# Allegro board GPS_INTERFACE_BOARDv7.brd
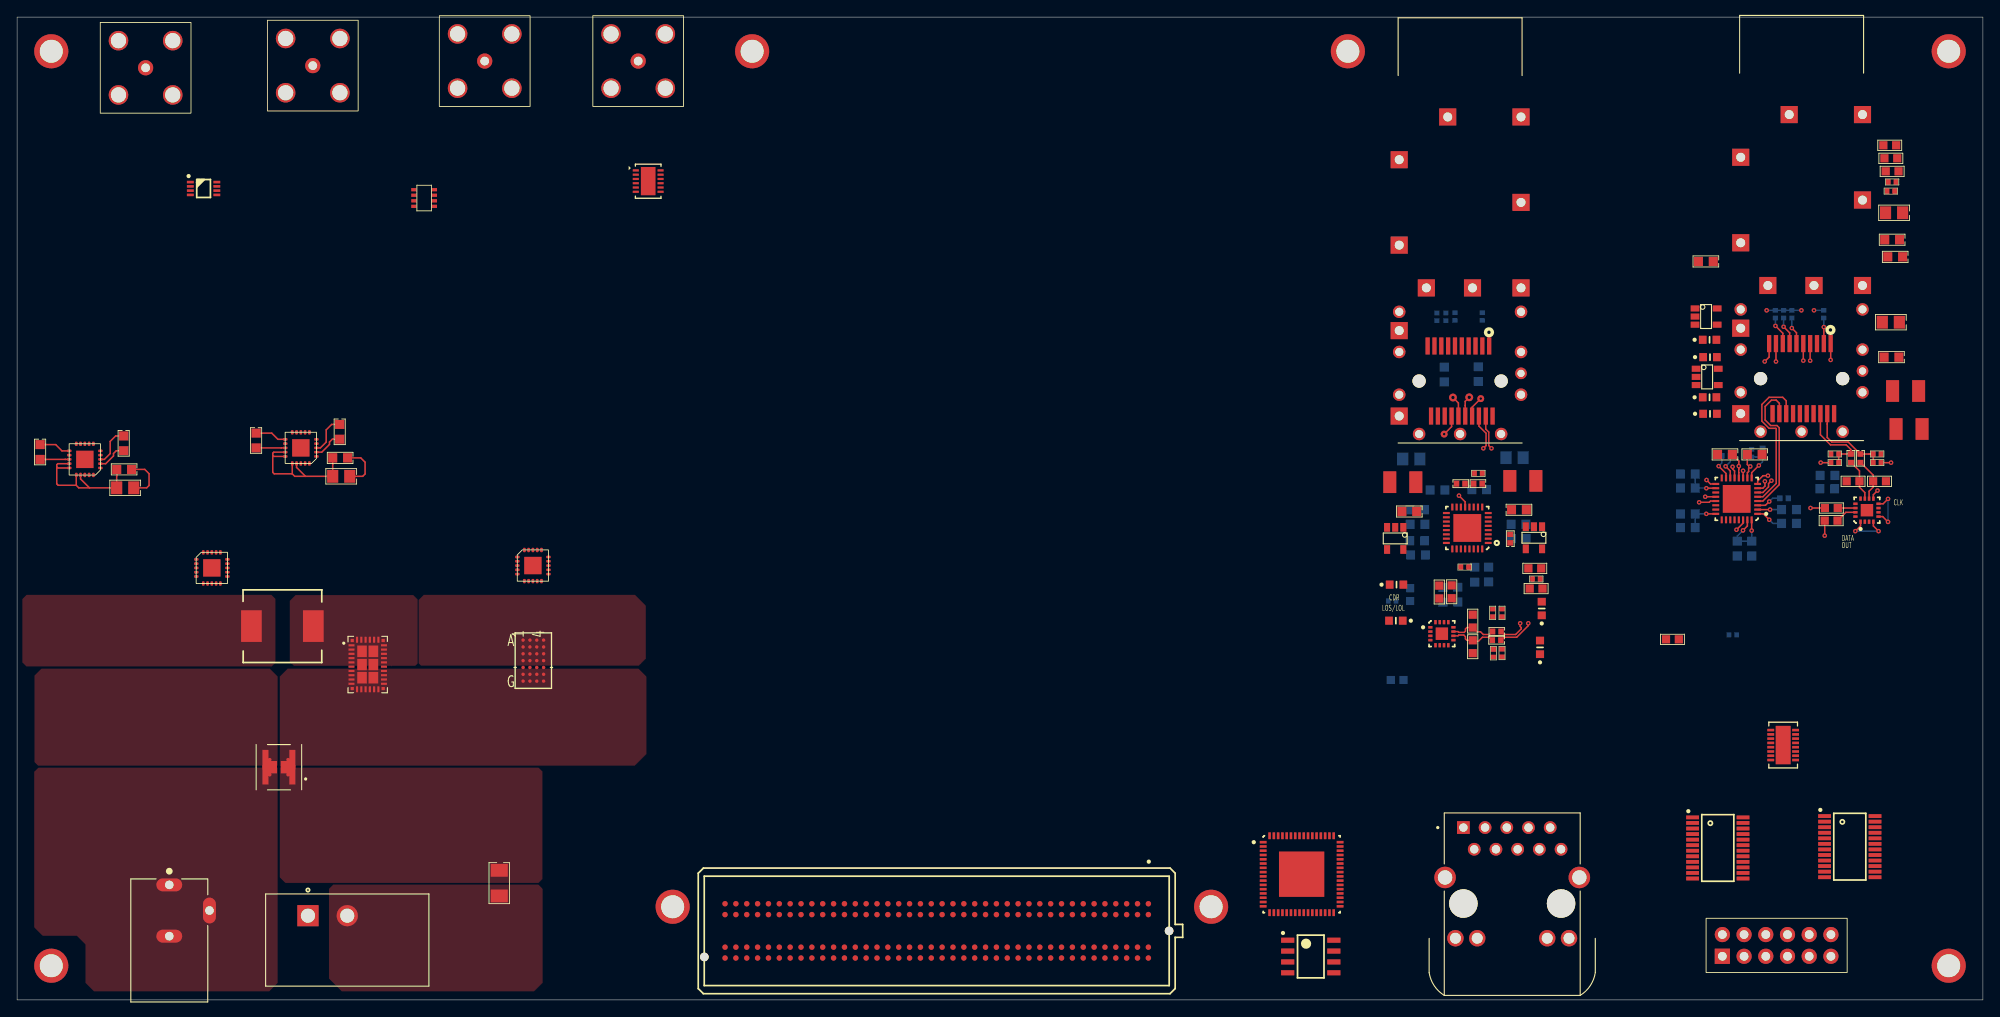
[diagram p0: board, top side]
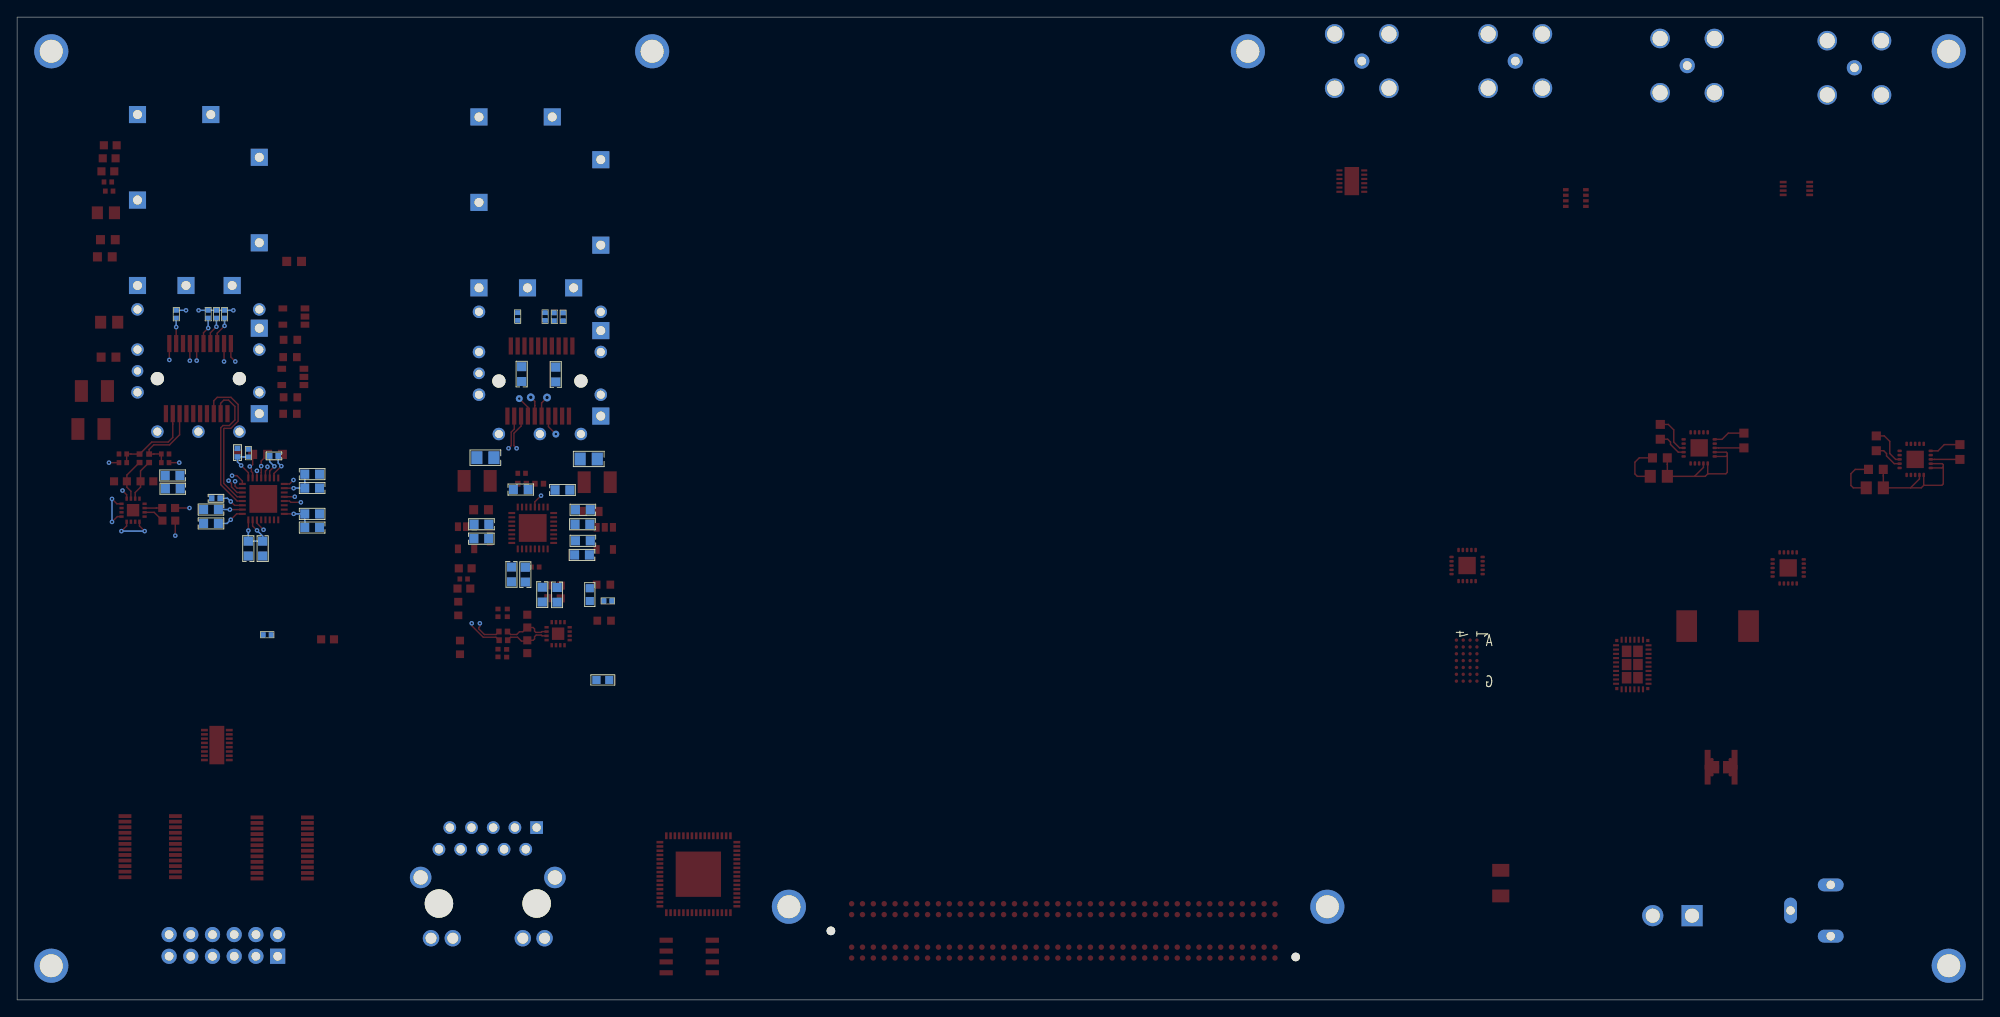
[diagram p1: board, bottom side, seen from below]

Outline 230 x 115 mm; copper layers: TOP, L2, L3, L4, L5, BOTTOM. Coordinates in mm from the lower left corner of the outline.
Outline path: 0,115 230,115 230,0 0,0 0,115

## Design rules (mm)
net group CLK315_SCOPE: nets CLK315_SCOPE_N CLK315_SCOPE_P
net group CLK_FDBACK: nets CLK_FDBACK_N CLK_FDBACK_P
net group CLK_TO_SFP.CLK_TO_SFP0: nets CLK_TO_SFP.CLK_TO_SFP_N0 CLK_TO_SFP.CLK_TO_SFP_P0
net group CLK_TO_SFP.CLK_TO_SFP1: nets CLK_TO_SFP.CLK_TO_SFP_N1 CLK_TO_SFP.CLK_TO_SFP_P1
net group CLK_TO_SFP.CLK_TO_SFP2: nets CLK_TO_SFP.CLK_TO_SFP_N2 CLK_TO_SFP.CLK_TO_SFP_P2
net group CLK_TO_SFP.CLK_TO_SFP3: nets CLK_TO_SFP.CLK_TO_SFP_N3 CLK_TO_SFP.CLK_TO_SFP_P3
net group CLK_TO_SFP.CLK_TO_SFP4: nets CLK_TO_SFP.CLK_TO_SFP_N4 CLK_TO_SFP.CLK_TO_SFP_P4
net group CLK_TO_SFP.CLK_TO_SFP5: nets CLK_TO_SFP.CLK_TO_SFP_N5 CLK_TO_SFP.CLK_TO_SFP_P5
net group CML_SFP_TD_SFP INTERFACE_SFP1: nets CML_SFP_TD_N_SFP INTERFACE_SFP1 CML_SFP_TD_P_SFP INTERFACE_SFP1
net group CML_SFP_TD_SFP INTERFACE_SFP2: nets CML_SFP_TD_N_SFP INTERFACE_SFP2 CML_SFP_TD_P_SFP INTERFACE_SFP2
net group CML_SFP_TD_SFP INTERFACE_SFP3: nets CML_SFP_TD_N_SFP INTERFACE_SFP3 CML_SFP_TD_P_SFP INTERFACE_SFP3
net group CML_SFP_TD_SFP INTERFACE_SFP4: nets CML_SFP_TD_N_SFP INTERFACE_SFP4 CML_SFP_TD_P_SFP INTERFACE_SFP4
net group CML_SFP_TD_SFP INTERFACE_SFP5: nets CML_SFP_TD_N_SFP INTERFACE_SFP5 CML_SFP_TD_P_SFP INTERFACE_SFP5
net group CML_SFP_TD_SFP INTERFACE_SFP6: nets CML_SFP_TD_N_SFP INTERFACE_SFP6 CML_SFP_TD_P_SFP INTERFACE_SFP6
net group FMC.CLK_TO_FPGA: nets FMC.CLK_TO_FPGA_N FMC.CLK_TO_FPGA_P
net group FMC.DATA_TO_FF0: nets FMC.DATA_TO_FF_N0 FMC.DATA_TO_FF_P0
net group FMC.DATA_TO_FF1: nets FMC.DATA_TO_FF_N1 FMC.DATA_TO_FF_P1
net group FMC.DATA_TO_FF2: nets FMC.DATA_TO_FF_N2 FMC.DATA_TO_FF_P2
net group FMC.DATA_TO_FF3: nets FMC.DATA_TO_FF_N3 FMC.DATA_TO_FF_P3
net group FMC.DATA_TO_FF4: nets FMC.DATA_TO_FF_N4 FMC.DATA_TO_FF_P4
net group FMC.DATA_TO_FF5: nets FMC.DATA_TO_FF_N5 FMC.DATA_TO_FF_P5
net group FMC.GPS_PPS: nets FMC.GPS_PPS_N FMC.GPS_PPS_P
net group FMC.GPS_SYNC_OUT: nets FMC.GPS_SYNC_OUT_N FMC.GPS_SYNC_OUT_P
net group FMC.RECOV_CLK0: nets FMC.RECOV_CLK_N0 FMC.RECOV_CLK_P0
net group FMC.RECOV_CLK1: nets FMC.RECOV_CLK_N1 FMC.RECOV_CLK_P1
net group FMC.RECOV_CLK2: nets FMC.RECOV_CLK_N2 FMC.RECOV_CLK_P2
net group FMC.RECOV_CLK3: nets FMC.RECOV_CLK_N3 FMC.RECOV_CLK_P3
net group FMC.RECOV_CLK4: nets FMC.RECOV_CLK_N4 FMC.RECOV_CLK_P4
net group FMC.RECOV_CLK5: nets FMC.RECOV_CLK_N5 FMC.RECOV_CLK_P5
net group FMC.RECOV_DATA0: nets FMC.RECOV_DATA_N0 FMC.RECOV_DATA_P0
net group FMC.RECOV_DATA1: nets FMC.RECOV_DATA_N1 FMC.RECOV_DATA_P1
net group FMC.RECOV_DATA2: nets FMC.RECOV_DATA_N2 FMC.RECOV_DATA_P2
net group FMC.RECOV_DATA3: nets FMC.RECOV_DATA_N3 FMC.RECOV_DATA_P3
net group FMC.RECOV_DATA4: nets FMC.RECOV_DATA_N4 FMC.RECOV_DATA_P4
net group FMC.RECOV_DATA5: nets FMC.RECOV_DATA_N5 FMC.RECOV_DATA_P5
net group GPS_CLK10: nets GPS_CLK10_N GPS_CLK10_P
net group GPS_CLK_SCOPE: nets GPS_CLK_SCOPE_N GPS_CLK_SCOPE_P
net group GPS_GROUP.GPS_CLK: nets GPS_GROUP.GPS_CLK_N GPS_GROUP.GPS_CLK_P
net group R_SFP INTERFACE_SFP1: nets R_N_SFP INTERFACE_SFP1 R_P_SFP INTERFACE_SFP1
net group R_SFP INTERFACE_SFP2: nets R_N_SFP INTERFACE_SFP2 R_P_SFP INTERFACE_SFP2
net group R_SFP INTERFACE_SFP3: nets R_N_SFP INTERFACE_SFP3 R_P_SFP INTERFACE_SFP3
net group R_SFP INTERFACE_SFP4: nets R_N_SFP INTERFACE_SFP4 R_P_SFP INTERFACE_SFP4
net group R_SFP INTERFACE_SFP5: nets R_N_SFP INTERFACE_SFP5 R_P_SFP INTERFACE_SFP5
net group R_SFP INTERFACE_SFP6: nets R_N_SFP INTERFACE_SFP6 R_P_SFP INTERFACE_SFP6
net group SFP_RD_SFP INTERFACE_SFP1: nets SFP_RD_N_SFP INTERFACE_SFP1 SFP_RD_P_SFP INTERFACE_SFP1
net group SFP_RD_SFP INTERFACE_SFP2: nets SFP_RD_N_SFP INTERFACE_SFP2 SFP_RD_P_SFP INTERFACE_SFP2
net group SFP_RD_SFP INTERFACE_SFP3: nets SFP_RD_N_SFP INTERFACE_SFP3 SFP_RD_P_SFP INTERFACE_SFP3
net group SFP_RD_SFP INTERFACE_SFP4: nets SFP_RD_N_SFP INTERFACE_SFP4 SFP_RD_P_SFP INTERFACE_SFP4
net group SFP_RD_SFP INTERFACE_SFP5: nets SFP_RD_N_SFP INTERFACE_SFP5 SFP_RD_P_SFP INTERFACE_SFP5
net group SFP_RD_SFP INTERFACE_SFP6: nets SFP_RD_N_SFP INTERFACE_SFP6 SFP_RD_P_SFP INTERFACE_SFP6
net group SFP_TD_SFP INTERFACE_SFP1: nets SFP_TD_N_SFP INTERFACE_SFP1 SFP_TD_P_SFP INTERFACE_SFP1
net group SFP_TD_SFP INTERFACE_SFP2: nets SFP_TD_N_SFP INTERFACE_SFP2 SFP_TD_P_SFP INTERFACE_SFP2
net group SFP_TD_SFP INTERFACE_SFP3: nets SFP_TD_N_SFP INTERFACE_SFP3 SFP_TD_P_SFP INTERFACE_SFP3
net group SFP_TD_SFP INTERFACE_SFP4: nets SFP_TD_N_SFP INTERFACE_SFP4 SFP_TD_P_SFP INTERFACE_SFP4
net group SFP_TD_SFP INTERFACE_SFP5: nets SFP_TD_N_SFP INTERFACE_SFP5 SFP_TD_P_SFP INTERFACE_SFP5
net group SFP_TD_SFP INTERFACE_SFP6: nets SFP_TD_N_SFP INTERFACE_SFP6 SFP_TD_P_SFP INTERFACE_SFP6
net group SPARE_RJ45_0: nets SPARE_RJ45_0_N SPARE_RJ45_0_P
net group SPARE_RJ45_1: nets SPARE_RJ45_1_N SPARE_RJ45_1_P
net group FMC[0..72]: nets FMC.CLK_FILTER_A FMC.CLK_FILTER_B FMC.CLK_GEN_INTR* FMC.CLK_GEN_LOL FMC.CLK_GEN_LOL_N FMC.CLK_GEN_RST* FMC.GPS_CLK_EN* FMC.GPS_IRIGB FMC.I2C_BUS_INT0* FMC.I2C_BUS_INT1* FMC.I2C_BUS_RST* FMC.OSC_EN FMC.PWR_GOOD FMC.SCL FMC.SDA FMC.SFP_TX_DISABLE0 FMC.SFP_TX_DISABLE1 FMC.SFP_TX_DISABLE2 FMC.SFP_TX_DISABLE3 FMC.SFP_TX_DISABLE4 FMC.SFP_TX_DISABLE5 FMC.SPARE_BNC_0 FMC.SPARE_BNC_1 FMC.SPARE_LEMO_0 FMC.SPARE_LEMO_1 FMC.SPARE_RJ45_RX_0 FMC.SPARE_RJ45_RX_1 FMC.SPARE_RJ45_TX_0 FMC.SPARE_RJ45_TX_1 FMC.SPARE_RJ45_TX_EN_0 FMC.SPARE_RJ45_TX_EN_1
net group VM1: nets GND_SIGNAL
nets with their own width: min track width 0.165; nets 12V_CONN 12V_FUSE 12V_SW A0_1 A0_1V8 A0_2 A0_3V3 A0_5V A0_BID A1_1 A1_1V8 A1_2 A1_5V A1_BID A2_BID BNC_DIR BNC_VCCA CDR_ADDR0 CDR_ADDR1 CDR_ADDR2 CDR_ADDR3 CDR_ADDR4 CDR_ADDR5 FB_1V8 FB_3V3_1 FB_3V3_2 FB_3V5 FB_5V FB_5V5 FPGA_3V3 FPGA_12V FPGA_IO_3V3 GND_IN GND_POWER GPS_CLK_IN GPS_IRIGB_IN GPS_PPS_IN GPS_SYNC_IN I2C_BUS_UNUSED INTVCC_1V8 INTVCC_3V3 INTVCC_5V LEMO_DIR LEMO_VCCA LOL* MOD_ABS_SFP INTERFACE_SFP1 MOD_ABS_SFP INTERFACE_SFP2 MOD_ABS_SFP INTERFACE_SFP3 MOD_ABS_SFP INTERFACE_SFP4 MOD_ABS_SFP INTERFACE_SFP5 MOD_ABS_SFP INTERFACE_SFP6 N00534 N00638 N01450_SFP INTERFACE_SFP1 N01450_SFP INTERFACE_SFP2 N01450_SFP INTERFACE_SFP3 N01450_SFP INTERFACE_SFP4 N01450_SFP INTERFACE_SFP5 N01450_SFP INTERFACE_SFP6 N01454_SFP INTERFACE_SFP1 N01454_SFP INTERFACE_SFP2 N01454_SFP INTERFACE_SFP3 N01454_SFP INTERFACE_SFP4 N01454_SFP INTERFACE_SFP5 N01454_SFP INTERFACE_SFP6 N01590 N02344 N04910_SFP INTERFACE_SFP1 N04910_SFP INTERFACE_SFP2 N04910_SFP INTERFACE_SFP3 N04910_SFP INTERFACE_SFP4 N04910_SFP INTERFACE_SFP5 N04910_SFP INTERFACE_SFP6 N04977_SFP INTERFACE_SFP1 N04977_SFP INTERFACE_SFP2 N04977_SFP INTERFACE_SFP3 N04977_SFP INTERFACE_SFP4 N04977_SFP INTERFACE_SFP5 N04977_SFP INTERFACE_SFP6 N10080 N20770 N32209 N32213 N89867 N89871 N89889 N89893 N90109 N90113 N90529 N91101 N91105 N107878 N127138 N136741_SFP INTERFACE_SFP1 N136741_SFP INTERFACE_SFP2 N136741_SFP INTERFACE_SFP3 N136741_SFP INTERFACE_SFP4 N136741_SFP INTERFACE_SFP5 N136741_SFP INTERFACE_SFP6 N140138 N141568_SFP INTERFACE_SFP1 N141568_SFP INTERFACE_SFP2 N141568_SFP INTERFACE_SFP3 N141568_SFP INTERFACE_SFP4 N141568_SFP INTERFACE_SFP5 N141568_SFP INTERFACE_SFP6 N146225 N169083 N169234 N179430 N179442 N180853 N180901 N183488 N183510 N183546 N185241 N198999 N199006 N199881 N199921 N202617 N202639 N202663 N202677 N210584_SFP INTERFACE_SFP1 N210584_SFP INTERFACE_SFP2 N210584_SFP INTERFACE_SFP3 N210584_SFP INTERFACE_SFP4 N210584_SFP INTERFACE_SFP5 N210584_SFP INTERFACE_SFP6 N222361_SFP INTERFACE_SFP1 N222361_SFP INTERFACE_SFP2 N222361_SFP INTERFACE_SFP3 N222361_SFP INTERFACE_SFP4 N222361_SFP INTERFACE_SFP5 N222361_SFP INTERFACE_SFP6 N222457_SFP INTERFACE_SFP1 N222457_SFP INTERFACE_SFP2 N222457_SFP INTERFACE_SFP3 N222457_SFP INTERFACE_SFP4 N222457_SFP INTERFACE_SFP5 N222457_SFP INTERFACE_SFP6 N222469_SFP INTERFACE_SFP1 N222469_SFP INTERFACE_SFP2 N222469_SFP INTERFACE_SFP3 N222469_SFP INTERFACE_SFP4 N222469_SFP INTERFACE_SFP5 N222469_SFP INTERFACE_SFP6 N224328 N224332 N224336 N224340 N224392 N224396 N224400 N224404 N224424 N224428 N224432 N224436 N224456 N224460 N224464 N224468 N224484 N224488 N224492 N224496 N245271 N245311 N245859 N245899 N246142 N246182 N246480 N246520 N249073 N249113 N250779 N252646 N252650 N253003 N253358 N253362 N266416 N266420 N267255 N267259 N324301 N325916 N325952 N326883 N326887 N326891 N326895 N334368 N334380 N334392 N334434 N339027 N339674 N339693 N341781 N350589 N350593 N352210 N352214 N367516 PG_1V8 PG_3V3 PG_3V5 PG_5V PG_5V5 RDY1 RDY2 RS_SFP INTERFACE_SFP1 RS_SFP INTERFACE_SFP2 RS_SFP INTERFACE_SFP3 RS_SFP INTERFACE_SFP4 RS_SFP INTERFACE_SFP5 RS_SFP INTERFACE_SFP6 RT_3V5 RT_5V5 SPARE_BNC_CONN_0 SPARE_BNC_CONN_1 SPARE_LEMO_CONN_0 SPARE_LEMO_CONN_1 SPARE_RJ45_CM SQUELCH_SFP INTERFACE_SFP1 SQUELCH_SFP INTERFACE_SFP2 SQUELCH_SFP INTERFACE_SFP3 SQUELCH_SFP INTERFACE_SFP4 SQUELCH_SFP INTERFACE_SFP5 SQUELCH_SFP INTERFACE_SFP6 SS_1V8 SS_3V3_1 SS_3V3_2 SS_5V SS_5V5 THRADJ_SFP INTERFACE_SFP1 THRADJ_SFP INTERFACE_SFP2 THRADJ_SFP INTERFACE_SFP3 THRADJ_SFP INTERFACE_SFP4 THRADJ_SFP INTERFACE_SFP5 THRADJ_SFP INTERFACE_SFP6 VCC1V8 VCC3V3 VCC3V3_LFILT VCC5V VCC5V_LFILT VCCR_SFP INTERFACE_SFP1 VCCR_SFP INTERFACE_SFP2 VCCR_SFP INTERFACE_SFP3 VCCR_SFP INTERFACE_SFP4 VCCR_SFP INTERFACE_SFP5 VCCR_SFP INTERFACE_SFP6 VCCT_SFP INTERFACE_SFP1 VCCT_SFP INTERFACE_SFP2 VCCT_SFP INTERFACE_SFP3 VCCT_SFP INTERFACE_SFP4 VCCT_SFP INTERFACE_SFP5 VCCT_SFP INTERFACE_SFP6 VDD_FILT VDDA_FILT VDDO8 VDDO9 VDDO_FILT VP1V8 VP3V3 VP3V5 VP5V VP5V5 VP12V VREF_SFP INTERFACE_SFP1 VREF_SFP INTERFACE_SFP2 VREF_SFP INTERFACE_SFP3 VREF_SFP INTERFACE_SFP4 VREF_SFP INTERFACE_SFP5 VREF_SFP INTERFACE_SFP6 XORL1 XORL2

## Placement (name value [footprint] x y rotation side)
C60  0.1UF  [CAP0603]  12.52 62.08 0 top
C61  47UF  [CAP0805]  12.65 59.92 0 top
C64  0.1UF  [CAP0603]  12.47 65.13 90 top
C65  0.01UF  [CAP0603]  2.69 64.11 90 top
C70  47UF  [CAP0805]  37.92 61.26 0 top
C71  0.1UF  [CAP0603]  37.8 63.42 0 top
C75  0.1UF  [CAP0603]  37.74 66.47 90 top
C76  0.01UF  [CAP0603]  27.97 65.46 90 top
C111  0.1UF  [CAP0603]  219.3 75.21 0 top
C112  0.1UF  [CAP0603]  219.74 86.94 0 top
C113  22UF  [CAP0805]  219.61 92.1 0 top
C114  0.1UF  [CAP0603]  219.38 88.95 0 top
C115  0.1UF  [CAP0603]  197.59 86.41 0 top
C116  22UF  [CAP0805]  219.23 79.3 0 top
C117  0.1UF  [CAP0603]  211.79 59.82 180 bottom
C118  1000PF  [CAP0603]  211.81 61.37 180 bottom
C119  0.1UF  [CAP0402]  214.55 63.37 90 top
C120  0.1UF  [CAP0402]  215.67 63.37 90 top
C121  0.1UF  [CAP0603]  207.31 57.38 180 bottom
C122  0.1UF  [CAP0603]  199.82 63.83 0 top
C123  0.1UF  [CAP0603]  195.48 61.52 0 bottom
C124  0.1UF  [CAP0603]  195.48 56.87 0 bottom
C125  0.1UF  [CAP0603]  201.27 52.81 90 bottom
C126  1000PF  [CAP0603]  207.31 55.75 0 bottom
C127  1000PF  [CAP0603]  203.3 63.83 0 top
C128  1000PF  [CAP0603]  195.48 59.89 180 bottom
C129  1000PF  [CAP0603]  195.48 55.27 180 bottom
C130  1000PF  [CAP0603]  202.95 52.81 270 bottom
C131  0.47UF  [CAP0402]  199.95 63.65 180 bottom
C132  0.1UF  [CAP0402]  204.22 64.03 270 bottom
C133  0.1UF  [CAP0402]  206.73 58.7 0 bottom
C157  0.1UF  [CAP0603]  162.89 57.15 0 top
C158  0.1UF  [CAP0603]  175.72 57.35 180 top
C159  22UF  [CAP0805]  163.12 63.3 180 bottom
C160  0.1UF  [CAP0603]  166.98 73.18 270 bottom
C161  0.1UF  [CAP0603]  170.97 73.23 270 bottom
C162  22UF  [CAP0805]  175.21 63.45 180 bottom
C163  0.1UF  [CAP0603]  168.55 47.42 90 bottom
C164  1000PF  [CAP0603]  166.83 47.4 90 bottom
C165  0.1UF  [CAP0402]  173.13 43.1 0 top
C166  0.1UF  [CAP0402]  173.1 42.09 0 top
C167  0.1UF  [CAP0603]  171.07 59.72 0 bottom
C168  0.1UF  [CAP0603]  163.86 55.65 180 bottom
C169  0.1UF  [CAP0603]  163.8 53.72 180 bottom
C170  0.1UF  [CAP0603]  172.16 49.78 90 bottom
C171  0.1UF  [CAP0603]  175.67 55.65 180 bottom
C172  1000PF  [CAP0603]  166.19 59.66 0 bottom
C173  1000PF  [CAP0603]  163.8 57.35 180 bottom
C174  1000PF  [CAP0603]  163.91 52.07 180 bottom
C175  1000PF  [CAP0603]  170.54 49.76 270 bottom
C176  1000PF  [CAP0603]  175.69 53.98 0 bottom
C177  0.47UF  [CAP0402]  168.91 60.4 180 top
C178  0.1UF  [CAP0402]  170.92 60.4 0 top
C179  0.1UF  [CAP0402]  174.7 53.98 270 top
D12  GREEN  [LEDC1608X80N]  198.07 68.58 0 top
D13  RED  [LEDC1608X80N]  198.02 77.24 0 top
D14  GREEN  [LEDC1608X80N]  198.02 70.51 0 top
D15  RED  [LEDC1608X80N]  198.07 75.21 0 top
D20  GREEN  [LEDC1608X80N]  178.18 41.25 90 top
D21  RED  [LEDC1608X80N]  178.38 45.8 90 top
D22  GREEN  [LEDC1608X80N]  161.39 48.59 0 top
D23  RED  [LEDC1608X80N]  161.32 44.37 180 top
F1  4A  [CAP1206]  56.41 13.67 90 top
FL1  120 Ohm@100MHz  [FIL_DLW5BTM501SQ2L]  30.63 27.23 270 top
IC1  SN74AVC2T45DCTR  [SOP50P310X90-8N]  21.82 94.95 0 top
IC2  SI5395A-A-GM  [QFN50P900X900X90-65N-S530]  150.29 14.71 0 top
IC3  24AA025E48T-I/OT  [SOIC127P600X175-8N]  151.36 5.08 0 top
IC6  PCA9539PW,118  [SOP65P640X110-24N]  214.43 17.93 0 top
IC7  PCA9539PW,118  [SOP65P640X110-24N]  198.98 17.78 0 top
J1  BNC/R  [BNC_RA_03161221]  72.67 109.86 0 top
J4  BNC/R  [BNC_RA_03161221]  54.71 109.86 0 top
J5  BNC/R  [BNC_RA_03161221]  34.59 109.32 0 top
J6  BNC/R  [BNC_RA_03161221]  15.04 109.07 0 top
J7  PJ-102AH  [CUI_PJ-102AH]  17.81 6.96 270 top
J8  ASP-134606-01  [SAMTEC_ASP-134606-01]  107.59 8.08 0 top
J17  6-2301994-2  [TE_6-2301994-2]  174.93 11.2 0 top
J18  1367073-1  [TE_2227023-1]  208.79 72.69 270 top
J20  1367073-1  [TE_2227023-1]  168.83 72.42 270 top
L6  3.3 uH  [WE-LHMI_8040]  31.04 43.74 180 top
L7  4.7 uH  [CAP1210]  221.36 66.8 0 top
L8  4.7 uH  [CAP1210]  220.95 71.25 0 top
L11  4.7 uH  [CAP1210]  162.13 60.58 0 top
L12  4.7 uH  [CAP1210]  176.17 60.73 180 top
NOREF  -  [unnamed]  155.7 111 0 top
NOREF#2  -  [unnamed]  226 4 0 top
NOREF#3  -  [unnamed]  4 4 0 top
NOREF#4  -  [unnamed]  86 111 0 top
NOREF#5  -  [unnamed]  4 111 0 top
NOREF#6  -  [unnamed]  139.7 10.9 0 top
NOREF#7  -  [unnamed]  226 111 0 top
NOREF#8  -  [unnamed]  76.7 10.9 0 top
P1  RECP6X2  [RECPT6X2_100]  199.52 5.11 90 top
R87  49.9 Ohm  [RES0603]  214.81 60.68 0 top
R88  49.9 Ohm  [RES0603]  217.91 60.68 180 top
R89  6.81k  [RES0402]  212.67 62.87 0 top
R90  6.81k  [RES0402]  217.63 62.87 180 top
R91  3.83K  [RES0402]  217.63 63.88 0 top
R92  4.7k  [RES0402]  205.71 80.24 270 bottom
R93  4.7k  [RES0402]  211.38 80.24 270 bottom
R94  3.83K  [RES0402]  212.67 63.88 180 top
R95  4.7k  [RES0402]  207.65 80.24 270 bottom
R96  4.99K  [RES0603]  212.27 57.56 0 top
R97  4.7k  [RES0402]  206.68 80.24 270 bottom
R98  4.99K  [RES0603]  212.24 56.08 0 top
R99  499 Ohm  [RES0402]  219.38 95.71 0 top
R100  75 Ohm  [RES0603]  219.1 100 0 top
R101  75 Ohm  [RES0603]  193.68 42.19 0 top
R102  0  [RES0402]  202.95 63.98 270 bottom
R103  0  [RES0402]  200.74 42.72 0 bottom
R104  499 Ohm  [RES0402]  219.23 94.64 0 top
R105  75 Ohm  [RES0603]  219.23 98.48 0 top
R106  75 Ohm  [RES0603]  219.38 96.95 0 top
R127  49.9 Ohm  [RES0603]  170.31 44.32 270 top
R128  49.9 Ohm  [RES0603]  170.31 41.33 90 top
R129  6.81k  [RES0402]  172.64 45.29 270 top
R130  6.81k  [RES0402]  172.72 40.56 90 top
R131  3.83K  [RES0402]  173.74 40.59 270 top
R132  4.7k  [RES0402]  166.12 79.93 270 bottom
R133  4.7k  [RES0402]  171.42 79.96 270 bottom
R134  3.83K  [RES0402]  173.74 45.29 90 top
R135  4.7k  [RES0402]  168.22 79.96 270 bottom
R136  4.99K  [RES0603]  167.84 47.75 270 top
R137  4.7k  [RES0402]  167.16 79.93 270 bottom
R138  4.99K  [RES0603]  166.4 47.73 270 top
R139  499 Ohm  [RES0402]  177.75 49.25 0 top
R140  75 Ohm  [RES0603]  177.57 50.5 0 top
R141  75 Ohm  [RES0603]  177.72 48.13 0 top
R142  0  [RES0402]  170.97 61.62 0 top
R143  0  [RES0402]  169.37 50.65 0 top
R144  499 Ohm  [RES0402]  160.88 46.69 180 bottom
R145  75 Ohm  [RES0603]  161.47 37.44 180 bottom
R146  75 Ohm  [RES0603]  162.99 47.42 90 bottom
S1  L101011MS02Q  [SW_L101011MS02Q]  38.63 7.01 0 top
U1  LTC6957IDD-2#PBF  [DFN_12]  73.84 95.81 0 top
U2  MAX9371EKA+  [SOT-23-8]  47.62 93.83 0 top
U5  LTM8063EY#PBF  [BGA28]  60.4 39.7 0 top
U6  LT8645SJV-2  [CONV_T8645SIV]  41.02 39.24 0 top
U7  TPS7A8500RGRT  [QFN20_3P65MMSQ]  60.35 50.83 0 top
U9  TPS7A8500RGRT  [QFN20_3P65MMSQ]  7.92 63.25 180 top
U11  TPS7A8500RGRT  [QFN20_3P65MMSQ]  33.2 64.59 180 top
U12  TPS7A8500RGRT  [QFN20_3P65MMSQ]  22.78 50.55 0 top
U16  NB7V52MMNG  [PQFN50P300X300X100-17N-S145]  216.43 57.3 90 top
U17  ADN2814ACPZ  [QFN50P500X500X100-33N-S325]  201.19 58.62 180 top
U18  SN74LVC1G32  [SOT23-5]  197.74 72.9 0 top
U19  SN74LVC1G32  [SOT23-5]  197.61 79.96 0 top
U24  NB7V52MMNG  [PQFN50P300X300X100-17N-S145]  166.7 42.85 0 top
U25  ADN2814ACPZ  [QFN50P500X500X100-33N-S325]  169.67 55.22 180 top
U26  SN74LVC1G32  [SOT23-5]  177.47 54.08 270 top
U27  SN74LVC1G32  [SOT23-5]  161.24 54 270 top
U40  LTC4317CDHC#PBF  [DFN-16_DHC]  206.63 29.82 0 top

## Library data of the parts
C60 C61 C64 C65 C70 C71 C75 C76 = CAP_NP: Tolerance: TOL?; User Part Number: PN?
C111-C133 = CAP_NP: Tolerance: TOL?; User Part Number: PN?; room: SFP1
C157-C179 = CAP_NP: Tolerance: TOL?; User Part Number: PN?; room: SFP3
D12 D14 = LED GREEN 0603_0: room: SFP1
D13 D15 = LED: room: SFP1
D20 D22 = LED GREEN 0603_0: room: SFP3
D21 D23 = LED: room: SFP3
F1 = FUSE: Tolerance: TOL?; User Part Number: PN?
FL1 = 490-11112-1-ND
IC1 = 74AVC2T45_DCT_0
IC2 = SI5395_QFN_1
IC3 = 24AA025E48_SOIC_0
IC6 IC7 = PCA9539_TSSOP_0
J1 J4-J6 = BNCR_3
J7 = PJ-102AH
J8 = CON160P_10
J17 = 6-2301994-2
J18 = CON20P_SFP-1367073-1_1: room: SFP1
J20 = CON20P_SFP-1367073-1_1: room: SFP3
L6 = IND
L7 L8 = IND: room: SFP1
L11 L12 = IND: room: SFP3
P1 = RECPT 6X2 100MIL
R87-R106 = R: Tolerance: TOL?; User Part Number: PN?; room: SFP1
R127-R146 = R: Tolerance: TOL?; User Part Number: PN?; room: SFP3
S1 = L101011MS02Q
U1 = LTC6957-2_3
U2 = MAX9371_2
U5 = LTM8063_0: User Part Number: PN; Tolerance: TOL
U6 = LT8645
U7 U9 U11 U12 = TPS7A8500RGRT
U16 = NB7V52M_2: room: SFP1
U17 = ADN2814ACPZ_1: room: SFP1
U18 U19 = SN74LVC1G32_4: room: SFP1
U24 = NB7V52M_2: room: SFP3
U25 = ADN2814ACPZ_1: room: SFP3
U26 U27 = SN74LVC1G32_4: room: SFP3
U40 = LTC4317CDHC_0: User Part Number: PN; Tolerance: TOL

## Footprints (pads in the part's own frame, mm; a bottom-side part is the same pattern mirrored in y, then rotated)
BGA28
  round 0.4 smd: A1(-1.2,2.4) A2(-0.4,2.4) A3(0.4,2.4) A4(1.2,2.4) B1(-1.2,1.6) B2(-0.4,1.6) B3(0.4,1.6) B4(1.2,1.6) C1(-1.2,0.8) C2(-0.4,0.8) C3(0.4,0.8) C4(1.2,0.8) D1(-1.2,0) D2(-0.4,0) D3(0.4,0) D4(1.2,0) E1(-1.2,-0.8) E2(-0.4,-0.8) E3(0.4,-0.8) E4(1.2,-0.8) F1(-1.2,-1.6) F2(-0.4,-1.6) F3(0.4,-1.6) F4(1.2,-1.6) G1(-1.2,-2.4) G2(-0.4,-2.4) G3(0.4,-2.4) G4(1.2,-2.4)
BNC_RA_03161221
  round 1.778 hole 1.016: 1(0,0)
  round 2.286 hole 1.778: 2(3.175,3.175) 3(3.175,-3.175) 4(-3.175,-3.175) 5(-3.175,3.175)
CAP0402
  rect 0.635x0.686 smd: 1(-0.499,0) 2(0.499,0)
CAP0603
  rect 1.05x1.08 smd: 1(-0.865,0) 2(0.865,0)
CAP0805
  rect 1.3x1.5 smd: 1(-1,0) 2(1,0)
CAP1206
  rect 1.5x2 smd: 1(-1.5,0) 2(1.5,0)
CAP1210
  rect 1.524x2.54 smd: 1(-1.524,0) 2(1.524,0)
CONV_T8645SIV
  rect 0.7x0.25 smd: 1(-1.9,2.25) 2(-1.9,1.75) 3(-1.9,1.25) 4(-1.9,0.75) 5(-1.9,0.25) 6(-1.9,-0.25) 7(-1.9,-0.75) 8(-1.9,-1.25) 9(-1.9,-1.75) 10(-1.9,-2.25) 17(1.9,-2.25) 18(1.9,-1.75) 19(1.9,-1.25) 20(1.9,-0.75) 21(1.9,-0.25) 22(1.9,0.25) 23(1.9,0.75) 24(1.9,1.25) 25(1.9,1.75) 26(1.9,2.25)
  rect 0.25x0.7 smd: 11(-1.25,-2.9) 12(-0.75,-2.9) 13(-0.25,-2.9) 14(0.25,-2.9) 15(0.75,-2.9) 16(1.25,-2.9) 27(1.25,2.9) 28(0.75,2.9) 29(0.25,2.9) 30(-0.25,2.9) 31(-0.75,2.9) 32(-1.25,2.9)
  rect 1.125x1.355 smd: 33(-0.662,1.543) 34(0.662,1.543) 37(-0.662,-1.543) 38(0.662,-1.543)
  rect 1.125x1.33 smd: 35(-0.662,0) 36(0.662,0)
  rect 0.375x0.375 smd: 39(-1.813,2.813) 40(-1.813,-2.813) 41(1.813,-2.813) 42(1.813,2.813)
CUI_PJ-102AH
  oval 1.508x3.016 hole 1: 1(-6.5,0) 2(-0.5,0)
  oval 3.016x1.508 hole 1: 3(-3.5,4.7)
DFN-16_DHC
  rect 0.805x0.3 smd: 1(-1.452,1.75) 2(-1.452,1.25) 3(-1.452,0.75) 4(-1.452,0.25) 5(-1.452,-0.25) 6(-1.452,-0.75) 7(-1.452,-1.25) 8(-1.452,-1.75) 9(1.452,-1.75) 10(1.452,-1.25) 11(1.452,-0.75) 12(1.452,-0.25) 13(1.452,0.25) 14(1.452,0.75) 15(1.452,1.25) 16(1.452,1.75)
  rect 1.75x4.5 smd: 17(0,0)
DFN_12
  rect 0.711x0.254 smd: 1(-1.45,1.25) 2(-1.45,0.75) 3(-1.45,0.25) 4(-1.45,-0.25) 5(-1.45,-0.75) 6(-1.45,-1.25) 7(1.45,-1.25) 8(1.45,-0.75) 9(1.45,-0.25) 10(1.45,0.25) 11(1.45,0.75) 12(1.45,1.25)
  rect 1.702x3.302 smd: 13(0,0)
FIL_DLW5BTM501SQ2L
  custom 2.3x1.7 smd: 1(0.875,1.075) 2(-0.875,1.075) 3(-0.875,-1.075) 4(0.875,-1.075)
LEDC1608X80N
  rect 0.9x0.95 smd: 1(-0.8,0) 2(0.8,0)
PQFN50P300X300X100-17N-S145
  rect 0.5x0.3 smd: 1(-1.35,0.75) 2(-1.35,0.25) 3(-1.35,-0.25) 4(-1.35,-0.75) 9(1.35,-0.75) 10(1.35,-0.25) 11(1.35,0.25) 12(1.35,0.75)
  rect 0.3x0.5 smd: 5(-0.75,-1.35) 6(-0.25,-1.35) 7(0.25,-1.35) 8(0.75,-1.35) 13(0.75,1.35) 14(0.25,1.35) 15(-0.25,1.35) 16(-0.75,1.35)
  rect 1.45x1.45 smd: 17(0,0)
QFN20_3P65MMSQ
  rrect 0.51x0.305 smd: 1(-1.82,1) 2(-1.82,0.5) 3(-1.82,0) 4(-1.82,-0.5) 5(-1.82,-1) 11(1.82,-1) 12(1.82,-0.5) 13(1.82,0) 14(1.82,0.5) 15(1.82,1)
  rrect 0.305x0.51 smd: 6(-1,-1.82) 7(-0.5,-1.82) 8(0,-1.82) 9(0.5,-1.82) 10(1,-1.82) 16(1,1.82) 17(0.5,1.82) 18(0,1.82) 19(-0.5,1.82) 20(-1,1.82)
  rect 2.032x2.032 smd: 21(0,0)
QFN50P500X500X100-33N-S325
  rect 0.8x0.25 smd: 1(-2.45,1.75) 2(-2.45,1.25) 3(-2.45,0.75) 4(-2.45,0.25) 5(-2.45,-0.25) 6(-2.45,-0.75) 7(-2.45,-1.25) 8(-2.45,-1.75) 17(2.45,-1.75) 18(2.45,-1.25) 19(2.45,-0.75) 20(2.45,-0.25) 21(2.45,0.25) 22(2.45,0.75) 23(2.45,1.25) 24(2.45,1.75)
  rect 0.25x0.8 smd: 9(-1.75,-2.45) 10(-1.25,-2.45) 11(-0.75,-2.45) 12(-0.25,-2.45) 13(0.25,-2.45) 14(0.75,-2.45) 15(1.25,-2.45) 16(1.75,-2.45) 25(1.75,2.45) 26(1.25,2.45) 27(0.75,2.45) 28(0.25,2.45) 29(-0.25,2.45) 30(-0.75,2.45) 31(-1.25,2.45) 32(-1.75,2.45)
  rect 3.25x3.25 smd: 33(0,0)
QFN50P900X900X90-65N-S530
  rect 0.8x0.3 smd: 1(-4.5,3.75) 2(-4.5,3.25) 3(-4.5,2.75) 4(-4.5,2.25) 5(-4.5,1.75) 6(-4.5,1.25) 7(-4.5,0.75) 8(-4.5,0.25) 9(-4.5,-0.25) 10(-4.5,-0.75) 11(-4.5,-1.25) 12(-4.5,-1.75) 13(-4.5,-2.25) 14(-4.5,-2.75) 15(-4.5,-3.25) 16(-4.5,-3.75) 33(4.5,-3.75) 34(4.5,-3.25) 35(4.5,-2.75) 36(4.5,-2.25) 37(4.5,-1.75) 38(4.5,-1.25) 39(4.5,-0.75) 40(4.5,-0.25) 41(4.5,0.25) 42(4.5,0.75) 43(4.5,1.25) 44(4.5,1.75) 45(4.5,2.25) 46(4.5,2.75) 47(4.5,3.25) 48(4.5,3.75)
  rect 0.3x0.8 smd: 17(-3.75,-4.5) 18(-3.25,-4.5) 19(-2.75,-4.5) 20(-2.25,-4.5) 21(-1.75,-4.5) 22(-1.25,-4.5) 23(-0.75,-4.5) 24(-0.25,-4.5) 25(0.25,-4.5) 26(0.75,-4.5) 27(1.25,-4.5) 28(1.75,-4.5) 29(2.25,-4.5) 30(2.75,-4.5) 31(3.25,-4.5) 32(3.75,-4.5) 49(3.75,4.5) 50(3.25,4.5) 51(2.75,4.5) 52(2.25,4.5) 53(1.75,4.5) 54(1.25,4.5) 55(0.75,4.5) 56(0.25,4.5) 57(-0.25,4.5) 58(-0.75,4.5) 59(-1.25,4.5) 60(-1.75,4.5) 61(-2.25,4.5) 62(-2.75,4.5) 63(-3.25,4.5) 64(-3.75,4.5)
  rect 5.3x5.3 smd: 65(0,0)
RECPT6X2_100
  rect 1.778x1.778 hole 1.016: 1(0,0)
  round 1.778 hole 1.016: 2(2.54,0) 3(0,-2.54) 4(2.54,-2.54) 5(0,-5.08) 6(2.54,-5.08) 7(0,-7.62) 8(2.54,-7.62) 9(0,-10.16) 10(2.54,-10.16) 11(0,-12.7) 12(2.54,-12.7)
RES0402
  rect 0.55x0.6 smd: 1(-0.45,0) 2(0.45,0)
RES0603
  rect 0.95x0.95 smd: 1(-0.75,0) 2(0.75,0)
SAMTEC_ASP-134606-01
  round 1.001 hole 1.3 unplated: (-27.19,-3.05) (27.19,0)
  round 0.64 smd: C1(24.765,3.175) C2(23.495,3.175) C3(22.225,3.175) C4(20.955,3.175) C5(19.685,3.175) C6(18.415,3.175) C7(17.145,3.175) C8(15.875,3.175) C9(14.605,3.175) C10(13.335,3.175) C11(12.065,3.175) C12(10.795,3.175) C13(9.525,3.175) C14(8.255,3.175) C15(6.985,3.175) C16(5.715,3.175) C17(4.445,3.175) C18(3.175,3.175) C19(1.905,3.175) C20(0.635,3.175) C21(-0.635,3.175) C22(-1.905,3.175) C23(-3.175,3.175) C24(-4.445,3.175) C25(-5.715,3.175) C26(-6.985,3.175) C27(-8.255,3.175) C28(-9.525,3.175) C29(-10.795,3.175) C30(-12.065,3.175) C31(-13.335,3.175) C32(-14.605,3.175) C33(-15.875,3.175) C34(-17.145,3.175) C35(-18.415,3.175) C36(-19.685,3.175) C37(-20.955,3.175) C38(-22.225,3.175) C39(-23.495,3.175) C40(-24.765,3.175) D1(24.765,1.905) D2(23.495,1.905) D3(22.225,1.905) D4(20.955,1.905) D5(19.685,1.905) D6(18.415,1.905) D7(17.145,1.905) D8(15.875,1.905) D9(14.605,1.905) D10(13.335,1.905) D11(12.065,1.905) D12(10.795,1.905) D13(9.525,1.905) D14(8.255,1.905) D15(6.985,1.905) D16(5.715,1.905) D17(4.445,1.905) D18(3.175,1.905) D19(1.905,1.905) D20(0.635,1.905) D21(-0.635,1.905) D22(-1.905,1.905) D23(-3.175,1.905) D24(-4.445,1.905) D25(-5.715,1.905) D26(-6.985,1.905) D27(-8.255,1.905) D28(-9.525,1.905) D29(-10.795,1.905) D30(-12.065,1.905) D31(-13.335,1.905) D32(-14.605,1.905) D33(-15.875,1.905) D34(-17.145,1.905) D35(-18.415,1.905) D36(-19.685,1.905) D37(-20.955,1.905) D38(-22.225,1.905) D39(-23.495,1.905) D40(-24.765,1.905) G1(24.765,-1.905) G2(23.495,-1.905) G3(22.225,-1.905) G4(20.955,-1.905) G5(19.685,-1.905) G6(18.415,-1.905) G7(17.145,-1.905) G8(15.875,-1.905) G9(14.605,-1.905) G10(13.335,-1.905) G11(12.065,-1.905) G12(10.795,-1.905) G13(9.525,-1.905) G14(8.255,-1.905) G15(6.985,-1.905) G16(5.715,-1.905) G17(4.445,-1.905) G18(3.175,-1.905) G19(1.905,-1.905) G20(0.635,-1.905) G21(-0.635,-1.905) G22(-1.905,-1.905) G23(-3.175,-1.905) G24(-4.445,-1.905) G25(-5.715,-1.905) G26(-6.985,-1.905) G27(-8.255,-1.905) G28(-9.525,-1.905) G29(-10.795,-1.905) G30(-12.065,-1.905) G31(-13.335,-1.905) G32(-14.605,-1.905) G33(-15.875,-1.905) G34(-17.145,-1.905) G35(-18.415,-1.905) G36(-19.685,-1.905) G37(-20.955,-1.905) G38(-22.225,-1.905) G39(-23.495,-1.905) G40(-24.765,-1.905) H1(24.765,-3.175) H2(23.495,-3.175) H3(22.225,-3.175) H4(20.955,-3.175) H5(19.685,-3.175) H6(18.415,-3.175) H7(17.145,-3.175) H8(15.875,-3.175) H9(14.605,-3.175) H10(13.335,-3.175) H11(12.065,-3.175) H12(10.795,-3.175) H13(9.525,-3.175) H14(8.255,-3.175) H15(6.985,-3.175) H16(5.715,-3.175) H17(4.445,-3.175) H18(3.175,-3.175) H19(1.905,-3.175) H20(0.635,-3.175) H21(-0.635,-3.175) H22(-1.905,-3.175) H23(-3.175,-3.175) H24(-4.445,-3.175) H25(-5.715,-3.175) H26(-6.985,-3.175) H27(-8.255,-3.175) H28(-9.525,-3.175) H29(-10.795,-3.175) H30(-12.065,-3.175) H31(-13.335,-3.175) H32(-14.605,-3.175) H33(-15.875,-3.175) H34(-17.145,-3.175) H35(-18.415,-3.175) H36(-19.685,-3.175) H37(-20.955,-3.175) H38(-22.225,-3.175) H39(-23.495,-3.175) H40(-24.765,-3.175)
SOIC127P600X175-8N
  rect 1.55x0.6 smd: 1(-2.7,1.905) 2(-2.7,0.635) 3(-2.7,-0.635) 4(-2.7,-1.905) 5(2.7,-1.905) 6(2.7,-0.635) 7(2.7,0.635) 8(2.7,1.905)
SOP50P310X90-8N
  rect 0.8x0.3 smd: 1(-1.55,0.75) 2(-1.55,0.25) 3(-1.55,-0.25) 4(-1.55,-0.75) 5(1.55,-0.75) 6(1.55,-0.25) 7(1.55,0.25) 8(1.55,0.75)
SOP65P640X110-24N
  rect 1.5x0.45 smd: 1(-2.95,3.575) 2(-2.95,2.925) 3(-2.95,2.275) 4(-2.95,1.625) 5(-2.95,0.975) 6(-2.95,0.325) 7(-2.95,-0.325) 8(-2.95,-0.975) 9(-2.95,-1.625) 10(-2.95,-2.275) 11(-2.95,-2.925) 12(-2.95,-3.575) 13(2.95,-3.575) 14(2.95,-2.925) 15(2.95,-2.275) 16(2.95,-1.625) 17(2.95,-0.975) 18(2.95,-0.325) 19(2.95,0.325) 20(2.95,0.975) 21(2.95,1.625) 22(2.95,2.275) 23(2.95,2.925) 24(2.95,3.575)
SOT23-5
  rect 1.016x0.711 smd: 1(-1.295,0.953) 2(-1.295,0) 3(-1.295,-0.953) 4(1.295,-0.953) 5(1.295,0.953)
SOT-23-8
  rect 0.66x0.381 smd: 1(-1.175,0.975) 2(-1.175,0.325) 3(-1.175,-0.325) 4(-1.175,-0.975) 5(1.175,-0.975) 6(1.175,-0.325) 7(1.175,0.325) 8(1.175,0.975)
SW_L101011MS02Q
  rect 2.48x2.48 hole 1.65: 1(-4.6,2.85)
  round 2.48 hole 1.65: 2(0,2.85)
TE_6-2301994-2
  round 3.33 hole 3.33 unplated: (-5.715,0.075) (5.715,0.075)
  rect 1.488x1.488 hole 0.98: P1(-5.715,8.965)
  round 1.488 hole 0.98: P2(-4.445,6.425) P3(-3.175,8.965) P4(-1.905,6.425) P5(-0.635,8.965) P6(0.635,6.425) P7(1.905,8.965) P8(3.175,6.425) P9(4.445,8.965) P10(5.715,6.425)
  round 1.92 hole 1.28: P11(-6.645,-3.985) P12(-4.095,-3.985) P13(4.095,-3.985) P14(6.645,-3.985)
  round 2.52 hole 1.68: S1(-7.855,3.125) S2(7.855,3.125)
TE_2227023-1
  round 1.55 hole 1.55 unplated: (0,4.8) (0,-4.8)
  rect 2x0.5 smd: 1(-4.1,3.4) 2(-4.1,2.6) 3(-4.1,1.8) 4(-4.1,1) 5(-4.1,0.2) 6(-4.1,-0.6) 7(-4.1,-1.4) 8(-4.1,-2.2) 9(-4.1,-3) 10(-4.1,-3.8) 11(4.1,-3.4) 12(4.1,-2.6) 13(4.1,-1.8) 14(4.1,-1) 15(4.1,-0.2) 16(4.1,0.6) 17(4.1,1.4) 18(4.1,2.2) 19(4.1,3) 20(4.1,3.8)
  round 1.358 hole 0.85: S1(-0.9,7.125)
  round 1.458 hole 0.95: S2(1.6,7.125) S3(-3.4,7.125) S4(-8.1,7.125) S5(6.2,4.8) S6(6.2,0) S7(6.2,-4.8) S8(1.6,-7.125) S9(-3.4,-7.125) S10(-8.1,-7.125)
  rect 2x2 hole 1.05: S11(-10.9,7.125) S12(-20.9,7.125) S13(-30.9,7.125) S14(-10.9,1.45) S15(-30.9,-1.45) S16(-10.9,-3.95) S17(-25.9,-7.125) S18(-15.9,-7.125) S19(-5.9,-7.125) S20(4.1,-7.125)
unnamed
  round 3.988 hole 2.692: 1(0,0)
WE-LHMI_8040
  rect 2.42x3.7 smd: 1(-3.62,0) 2(3.62,0)

## Nets
12V_CONN: J7.1 S1.1
12V_FUSE: F1.2 FL1.1
12V_SW: F1.1 S1.2
GND_IN: FL1.4 J7.2 J7.3
GND_POWER: C60.2 C61.2 C65.2 C70.2 C71.2 C76.2 FL1.3 IC1.3 IC1.4 IC2.65 J1.2 J1.3 J1.4 J1.5 J4.2 J4.3 J4.4 J4.5 J5.2 J5.3 J5.4 J5.5 J6.2 J6.3 J6.4 J6.5 J8.C1 J8.C4 J8.C5 J8.C9 J8.C12 J8.C13 J8.C16 J8.C17 J8.C20 J8.C21 J8.C24 J8.C25 J8.C28 J8.C29 J8.C32 J8.C33 J8.C34 J8.C36 J8.C38 J8.C40 J8.D2 J8.D3 J8.D6 J8.D7 J8.D10 J8.D13 J8.D16 J8.D19 J8.D22 J8.D25 J8.D28 J8.D34 J8.D37 J8.D39 J8.G1 J8.G4 J8.G5 J8.G8 J8.G11 J8.G14 J8.G17 J8.G20 J8.G23 J8.G26 J8.G29 J8.G32 J8.G35 J8.G38 J8.G40 J8.H3 J8.H6 J8.H9 J8.H12 J8.H15 J8.H18 J8.H21 J8.H24 J8.H27 J8.H30 J8.H33 J8.H36 J8.H39 J17.P10 J17.P11 J17.P12 J17.P13 J17.P14 J17.S1 J17.S2(SHIELD_1) P1.2 P1.4 P1.6 P1.8 P1.10 P1.12 U1.5 U1.13 U2.2 U5.A1 U5.A4 U5.B2 U5.C2 U5.C3 U5.D1 U5.D2 U5.D3 U5.D4 U5.E1 U5.E2 U5.E3 U5.E4 U6.3 U6.7 U6.8 U6.9 U6.10 U6.17 U6.18 U6.19 U6.20 U6.24 U6.30 U6.33 U6.34 U6.35 U6.36 U6.37 U6.38 U6.39 U6.40 U6.41 U6.42 U7.8 U7.18 U7.21 U9.6 U9.8 U9.10 U9.11 U9.18 U9.21 U11.6 U11.8 U11.10 U11.11 U11.18 U11.21 U12.7 U12.8 U12.10 U12.18 U12.21
GND_SIGNAL: C111.2 C112.2 C113.1 C114.1 C115.1 C116.1 C117.2 C118.2 C121.1 C122.1 C123.1 C124.1 C125.1 C126.2 C127.2 C128.2 C129.2 C130.2 C132.1 C133.2 C157.2 C158.2 C159.1 C160.1 C161.1 C162.1 C163.2 C164.2 C167.1 C168.1 C169.1 C170.1 C171.1 C172.2 C173.2 C174.2 C175.2 C176.2 C178.1 C179.2 IC3.4(VSS) IC6.12 IC7.12 J18.1 J18.9 J18.10 J18.11 J18.14 J18.17 J18.20(VEET2) J18.S1 J18.S2 J18.S3 J18.S4 J18.S5 J18.S6 J18.S7 J18.S8 J18.S9 J18.S10 J18.S11 J18.S12 J18.S13 J18.S14 J18.S15 J18.S16 J18.S17 J18.S18 J18.S19 J18.S20 J20.1 J20.9 J20.10 J20.11 J20.14 J20.17 J20.20(VEET2) J20.S1 J20.S2 J20.S3 J20.S4 J20.S5 J20.S6 J20.S7 J20.S8 J20.S9 J20.S10 J20.S11 J20.S12 J20.S13 J20.S14 J20.S15 J20.S16 J20.S17 J20.S18 J20.S19 J20.S20 R91.2 R94.2 R96.1 R100.2 R101.2 R102.1 R103.2 R105.2 R106.2 R131.2 R134.2 R136.1 R140.2 R141.2 R142.1 R143.2 R145.2 R146.2 U16.9 U16.17 U17.6 U17.7 U17.8 U17.11 U17.13 U17.17 U17.23 U17.30 U17.33 U18.3 U19.3 U24.9 U24.17 U25.6 U25.7 U25.8 U25.11 U25.13 U25.17 U25.23 U25.30 U25.33 U26.3 U27.3 U40.1 U40.3 U40.5 U40.17
VCC1V8: C117.1 C118.1 C163.1 C164.1 R87.1 R88.1 R98.1 R127.1 R128.1 R138.1 U16.12 U24.12
VCC3V3: C111.1 C112.1 C121.2 C122.2 C123.2 C124.2 C125.2 C126.1 C127.1 C128.1 C129.1 C130.1 C157.1 C158.1 C167.2 C168.2 C169.2 C170.2 C171.2 C172.1 C173.1 C174.1 C175.1 C176.1 D12.2 D14.2 D20.2 D22.2 IC1.8(VCCB) IC3.8 IC6.24(VDD) IC7.24(VDD) L7.1 L8.1 L11.1 L12.1 P1.9 R89.1 R90.1 R92.1 R93.1 R95.1 R97.1 R129.1 R130.1 R132.1 R133.1 R135.1 R137.1 U17.1 U17.2 U17.10 U17.12 U17.18 U17.24 U17.31 U17.32 U18.5 U19.5 U25.1 U25.2 U25.10 U25.12 U25.18 U25.24 U25.31 U25.32 U26.5 U27.5 U40.7
VCC3V3_LFILT: U1.2(VCC)
VCC5V: IC1.1 IC1.5 P1.11
VCC5V_LFILT: U2.1(VCC)
VCCR_SFP INTERFACE_SFP1: C113.2 C114.2 J18.15 L7.2
VCCR_SFP INTERFACE_SFP3: C159.2 C160.2 J20.15 L11.2
VCCT_SFP INTERFACE_SFP1: C115.2 C116.2 J18.16 L8.2
VCCT_SFP INTERFACE_SFP3: C161.2 C162.2 J20.16 L12.2
VDD_FILT: IC2.32 IC2.46 IC2.60
VDDA_FILT: IC2.13
VDDO8: IC2.52
VDDO9: IC2.57
VDDO_FILT: IC2.22 IC2.26 IC2.29 IC2.33 IC2.36 IC2.40 IC2.43 IC2.49
A0_1: IC6.21
A0_2: IC7.21
A0_BID: IC3.1
A1_1: IC6.2
A1_2: IC7.2
A1_BID: IC3.2
A2_BID: IC3.3
CLK_FDBACK_N: IC2.62
CLK_FDBACK_P: IC2.61
CLK_TO_SFP.CLK_TO_SFP_N0: IC2.23 U16.7
CLK_TO_SFP.CLK_TO_SFP_N1: IC2.27
CLK_TO_SFP.CLK_TO_SFP_N2: IC2.30 U24.7
CLK_TO_SFP.CLK_TO_SFP_N3: IC2.34
CLK_TO_SFP.CLK_TO_SFP_N4: IC2.37
CLK_TO_SFP.CLK_TO_SFP_N5: IC2.41
CLK_TO_SFP.CLK_TO_SFP_P0: IC2.24 U16.6
CLK_TO_SFP.CLK_TO_SFP_P1: IC2.28
CLK_TO_SFP.CLK_TO_SFP_P2: IC2.31 U24.6
CLK_TO_SFP.CLK_TO_SFP_P3: IC2.35
CLK_TO_SFP.CLK_TO_SFP_P4: IC2.38
CLK_TO_SFP.CLK_TO_SFP_P5: IC2.42
CML_SFP_TD_N_SFP INTERFACE_SFP1: C120.1 R88.2 U16.10
CML_SFP_TD_N_SFP INTERFACE_SFP3: C166.1 R128.2 U24.10
CML_SFP_TD_P_SFP INTERFACE_SFP1: C119.1 R87.2 U16.11
CML_SFP_TD_P_SFP INTERFACE_SFP3: C165.1 R127.2 U24.11
FB_1V8: U12.3
FB_3V3_1: C64.2 U9.3
FB_3V3_2: C75.2 U11.3
FB_3V5: U6.32
FB_5V: U7.3
FB_5V5: U5.A2
FMC.CLK_FILTER_A: J8.C14 U1.1
FMC.CLK_FILTER_B: J8.C15 U1.6
FMC.CLK_GEN_INTR*: IC2.12 J8.C27
FMC.CLK_GEN_LOL: J8.C26
FMC.CLK_GEN_LOL_N: J8.C10
FMC.CLK_GEN_RST*: IC2.6 J8.C19
FMC.CLK_TO_FPGA_N: IC2.44 J8.G3
FMC.CLK_TO_FPGA_P: IC2.45 J8.G2
FMC.DATA_TO_FF_N0: J8.H8 U16.3
FMC.DATA_TO_FF_N1: J8.H11
FMC.DATA_TO_FF_N2: J8.H14 U24.3
FMC.DATA_TO_FF_N3: J8.H17
FMC.DATA_TO_FF_N4: J8.H20
FMC.DATA_TO_FF_N5: J8.H23
FMC.DATA_TO_FF_P0: J8.H7 U16.2
FMC.DATA_TO_FF_P1: J8.H10
FMC.DATA_TO_FF_P2: J8.H13 U24.2
FMC.DATA_TO_FF_P3: J8.H16
FMC.DATA_TO_FF_P4: J8.H19
FMC.DATA_TO_FF_P5: J8.H22
FMC.GPS_CLK_EN*: J8.C11 U1.12
FMC.GPS_IRIGB: IC1.7 J8.D11
FMC.GPS_PPS_N: J8.H5
FMC.GPS_PPS_P: J8.H4
FMC.GPS_SYNC_OUT_N: J8.D21
FMC.GPS_SYNC_OUT_P: J8.D20
FMC.I2C_BUS_INT0*: IC6.1 J8.D14
FMC.I2C_BUS_INT1*: IC7.1 J8.D15
FMC.I2C_BUS_RST*: IC6.3 IC7.3 J8.D12
FMC.OSC_EN: J8.C18
FMC.PWR_GOOD: J8.D1
FMC.RECOV_CLK_N0: J8.G10 U17.25
FMC.RECOV_CLK_N1: J8.G13
FMC.RECOV_CLK_N2: J8.G16 U25.25
FMC.RECOV_CLK_N3: J8.G19
FMC.RECOV_CLK_N4: J8.G22
FMC.RECOV_CLK_N5: J8.G25
FMC.RECOV_CLK_P0: J8.G9 U17.26
FMC.RECOV_CLK_P1: J8.G12
FMC.RECOV_CLK_P2: J8.G15 U25.26
FMC.RECOV_CLK_P3: J8.G18
FMC.RECOV_CLK_P4: J8.G21
FMC.RECOV_CLK_P5: J8.G24
FMC.RECOV_DATA_N0: J8.H26 U17.28
FMC.RECOV_DATA_N1: J8.H29
FMC.RECOV_DATA_N2: J8.H32 U25.28
FMC.RECOV_DATA_N3: J8.H35
FMC.RECOV_DATA_N4: J8.H38
FMC.RECOV_DATA_N5: J8.G37
FMC.RECOV_DATA_P0: J8.H25 U17.29
FMC.RECOV_DATA_P1: J8.H28
FMC.RECOV_DATA_P2: J8.H31 U25.29
FMC.RECOV_DATA_P3: J8.H34
FMC.RECOV_DATA_P4: J8.H37
FMC.RECOV_DATA_P5: J8.G36
FMC.SCL: IC2.16 IC3.6 IC6.22 IC7.22 J8.C30 J18.5 U17.20 U40.15
FMC.SDA: IC2.18 IC3.5 IC6.23 IC7.23 J8.C31 J18.4 U17.21 U40.12
FMC.SFP_TX_DISABLE0: J8.G27 J18.3
FMC.SFP_TX_DISABLE1: J8.G28
FMC.SFP_TX_DISABLE2: J8.G30 J20.3
FMC.SFP_TX_DISABLE3: J8.G31
FMC.SFP_TX_DISABLE4: J8.G33
FMC.SFP_TX_DISABLE5: J8.G34
FMC.SPARE_BNC_0: J8.D23
FMC.SPARE_BNC_1: J8.D24
FMC.SPARE_LEMO_0: J8.D26
FMC.SPARE_LEMO_1: J8.D27
FMC.SPARE_RJ45_RX_0: J8.C23
FMC.SPARE_RJ45_RX_1: J8.D8
FMC.SPARE_RJ45_TX_0: J8.C22
FMC.SPARE_RJ45_TX_1: J8.D9
FMC.SPARE_RJ45_TX_EN_0: J8.D17
FMC.SPARE_RJ45_TX_EN_1: J8.D18
FPGA_3V3: J8.C39 J8.D32 J8.D36 J8.D38 J8.D40
FPGA_12V: J8.C35 J8.C37
FPGA_IO_3V3: J8.G39(VCC_IO_2) J8.H40
GPS_CLK10_N: IC2.64
GPS_CLK10_P: IC2.63
GPS_CLK_IN: J1.1(SIGNAL)
GPS_GROUP.GPS_CLK_N: U1.10
GPS_GROUP.GPS_CLK_P: U1.11
GPS_IRIGB_IN: IC1.2 J4.1(SIGNAL)
GPS_PPS_IN: J5.1(SIGNAL) U2.3
GPS_SYNC_IN: J6.1(SIGNAL)
I2C_BUS_UNUSED: IC7.13 IC7.14 IC7.15 IC7.16 IC7.17 IC7.18 IC7.19 IC7.20
LOL*: IC2.47
MOD_ABS_SFP INTERFACE_SFP1: J18.6 R95.2
MOD_ABS_SFP INTERFACE_SFP3: J20.6 R135.2
N01450_SFP INTERFACE_SFP1: C131.1 U17.14
N01450_SFP INTERFACE_SFP3: C177.1 U25.14
N01454_SFP INTERFACE_SFP1: C131.2 U17.15
N01454_SFP INTERFACE_SFP3: C177.2 U25.15
N04910_SFP INTERFACE_SFP1: U16.1 U16.4
N04910_SFP INTERFACE_SFP3: U24.1 U24.4
N04977_SFP INTERFACE_SFP1: U16.5 U16.8
N04977_SFP INTERFACE_SFP3: U24.5 U24.8
N136741_SFP INTERFACE_SFP1: D13.1(CATHODE) R100.1
N136741_SFP INTERFACE_SFP3: D21.1(CATHODE) R140.1
N141568_SFP INTERFACE_SFP1: D13.2 R99.2 U18.4(Y)
N141568_SFP INTERFACE_SFP3: D21.2 R139.2 U26.4(Y)
N210584_SFP INTERFACE_SFP1: D12.1(K) R99.1 R101.1
N210584_SFP INTERFACE_SFP3: D20.1(K) R139.1 R141.1
N222361_SFP INTERFACE_SFP1: D14.1(K) R104.1 R106.1
N222361_SFP INTERFACE_SFP3: D22.1(K) R144.1 R146.1
N222457_SFP INTERFACE_SFP1: D15.2 R104.2 U19.4(Y)
N222457_SFP INTERFACE_SFP3: D23.2 R144.2 U27.4(Y)
N222469_SFP INTERFACE_SFP1: D15.1(CATHODE) R105.1
N222469_SFP INTERFACE_SFP3: D23.1(CATHODE) R145.1
PG_1V8: U12.4
PG_3V3: U9.4 U11.4
PG_3V5: U6.31
PG_5V: U7.4
PG_5V5: U5.B1
R_N_SFP INTERFACE_SFP1: R98.2 U16.15
R_N_SFP INTERFACE_SFP3: R138.2 U24.15
R_P_SFP INTERFACE_SFP1: R96.2 U16.14
R_P_SFP INTERFACE_SFP3: R136.2 U24.14
RDY1: U40.10
RDY2: U40.9
RS_SFP INTERFACE_SFP1: J18.7 R97.2
RS_SFP INTERFACE_SFP3: J20.7 R137.2
RT_3V5: U6.26
RT_5V5: U5.C1
SFP_RD_N_SFP INTERFACE_SFP1: J18.12 U17.4
SFP_RD_N_SFP INTERFACE_SFP3: J20.12 U25.4
SFP_RD_P_SFP INTERFACE_SFP1: J18.13 U17.5
SFP_RD_P_SFP INTERFACE_SFP3: J20.13 U25.5
SFP_TD_N_SFP INTERFACE_SFP1: C120.2 J18.19 R90.2 R91.1
SFP_TD_N_SFP INTERFACE_SFP3: C166.2 J20.19 R130.2 R131.1
SFP_TD_P_SFP INTERFACE_SFP1: C119.2 J18.18 R89.2 R94.1
SFP_TD_P_SFP INTERFACE_SFP3: C165.2 J20.18 R129.2 R134.1
SPARE_BNC_CONN_0: P1.1
SPARE_BNC_CONN_1: P1.3
SPARE_LEMO_CONN_0: P1.5 P1.7
SPARE_RJ45_0_N: J17.P3
SPARE_RJ45_0_P: J17.P2
SPARE_RJ45_1_N: J17.P5
SPARE_RJ45_1_P: J17.P4
SPARE_RJ45_CM: J17.P1
SQUELCH_SFP INTERFACE_SFP1: R103.1 U17.27
SQUELCH_SFP INTERFACE_SFP3: R143.1 U25.27
SS_1V8: U12.13
SS_3V3_1: C65.1 U9.13
SS_3V3_2: C76.1 U11.13
SS_5V: U7.13
SS_5V5: U5.A3
THRADJ_SFP INTERFACE_SFP1: C132.2 R102.2 U17.9
THRADJ_SFP INTERFACE_SFP3: C178.2 R142.2 U25.9
VP1V8: U12.1 U12.2(SNS) U12.19 U12.20
VP3V5: C60.1 C61.1 C70.1 C71.1 L6.2 U6.1 U9.14 U9.15 U9.16 U9.17 U11.14 U11.15 U11.16 U11.17 U12.14 U12.15 U12.16 U12.17
VP5V: U7.1 U7.2(SNS) U7.19 U7.20
VP5V5: U5.F1 U5.F2 U5.F3 U5.F4 U5.G1 U5.G2 U5.G3 U5.G4(VOUT8) U7.14 U7.15 U7.16 U7.17
VP12V: FL1.2 U5.B3 U5.B4 U5.C4 U6.4 U6.5 U6.6 U6.21 U6.22 U6.23(VIN6) U6.25
VREF_SFP INTERFACE_SFP1: C133.1 U17.3(VREF)
VREF_SFP INTERFACE_SFP3: C179.1 U25.3(VREF)
XORL1: U40.6
XORL2: U40.4(XORL2)
N00638: U1.4
N01590: U1.7
N02344: U2.7
N32209: U40.8
N32213: U40.2
N89867: IC2.25
N89871: IC2.4
N89889: IC2.3
N89893: IC2.48
N90109: IC2.19
N90113: IC2.17
N90529: IC2.11
N91101: IC2.59
N91105: IC2.58
N107878: IC2.39
N127138: U1.3
N140138: L6.1 U6.12 U6.13 U6.14 U6.15 U6.16
N146225: C64.1 U9.1 U9.2(SNS) U9.19 U9.20
N179430: IC2.51
N179442: IC2.50
N183488: U1.8
N185241: C75.1 U11.1 U11.2(SNS) U11.19 U11.20
N202617: U40.16
N202639: U40.11
N202663: J20.5 U25.20 U40.14
N202677: J20.4 U25.21 U40.13
N224328: IC6.4 U17.16 U19.1
N224332: IC6.5 U17.22 U19.2
N224336: IC6.7 J18.2 R93.2 U18.1
N224340: IC6.6 J18.8 R92.2 U18.2
N224392: IC6.13 U25.16 U27.1
N224396: IC6.14 U25.22 U27.2
N224400: IC6.16 J20.2 R133.2 U26.1
N224404: IC6.15 J20.8 R132.2 U26.2
N224424: IC6.17
N224428: IC6.18
N224432: IC6.20
N224436: IC6.19
N224456: IC7.4
N224460: IC7.5
N224464: IC7.7
N224468: IC7.6
N224484: IC7.8
N224488: IC7.9
N224492: IC7.11
N224496: IC7.10
N252646: U17.19
N253003: U25.19
N266416: IC6.11
N266420: IC6.10
N267255: IC6.8
N267259: IC6.9
N324301: U1.9
N326883: IC2.15
N326887: IC2.14
N326891: IC2.2
N326895: IC2.1
N334368: IC2.8
N334380: IC2.9(XB)
N334392: IC2.7
N334434: IC2.10
N341781: U2.6
N367516: J17.P6 J17.P7 J17.P8 J17.P9

Pads without a net: IC1 6; IC2 5 20 21 53 54 55 56; IC3 7; J8 C2 C3 C6 C7 C8 D4 D5 D29 D30 D31 D33 D35 G6 G7 H1 H2; NOREF 1; NOREF#2 1; NOREF#3 1; NOREF#4 1; NOREF#5 1; NOREF#6 1; NOREF#7 1; NOREF#8 1; U2 4 5 8; U6 2 11 27 28 29; U7 5 6 7 9 10 11 12; U9 5 7 9 12; U11 5 7 9 12; U12 5 6 9 11 12; U16 13 16; U24 13 16

## Via types
v1: diameter 0.533, hole 0.254, TOP to BOTTOM, 47 vias
v2: diameter 0.914, hole 0.406, TOP to BOTTOM, 2 vias
v3: diameter 0.813, hole 0.305, TOP to BOTTOM, 2 vias

## Routing (per net, layer and track width the routed paths; a pad name or vN(x,y) marks a point on that pad's centre or on a via; arc(x,y) is an arc through that point)
GND_POWER: length 130.5
  TOP w0.17: C60.2 14.94,62.08 15.44,61.57 15.44,60.2 15.16,59.92 C61.2 ; C65.2 4.52,64.97 5.25,64.25 U9.11 ; C76.2 29.79,66.32 30.52,65.59 U11.11 ; C71.2 40.21,63.42 40.72,62.92 40.72,61.54 40.44,61.26 C70.2
  L2 w0.165: J17.P11 168.28,8.35 ; J17.P11 167.15,7.22 ; J17.P11 168.28,6.08 ; J17.P11 169.42,7.22 ; J17.S1 167.07,15.76 ; J17.S1 167.07,12.89 ; J17.S1 165.64,14.33 ; J17.S1 168.51,14.33 ; 199.52,6.71 P1.2 ; P1.2 198.58,7.65 ; P1.2 199.52,8.59 ; P1.2 200.46,7.65 ; 179.02,6.08 J17.P13 ; J17.P13 179.02,8.35 ; J17.P13 177.89,7.22 ; J17.P13 180.16,7.22 ; 182.78,12.89 J17.S2 ; J17.S2 181.35,14.33 ; J17.S2 182.78,15.76 ; J17.S2 184.22,14.33 ; 180.44,7.22 J17.P14 ; J17.P14 181.57,8.35 ; J17.P14 181.57,6.08 ; J17.P14 182.71,7.22 ; 204.6,6.71 P1.6 ; P1.6 205.54,7.65 ; P1.6 204.6,8.59 ; P1.6 203.66,7.65 ; 169.7,7.22 J17.P12 ; J17.P12 170.83,8.35 ; J17.P12 171.97,7.22 ; J17.P12 170.83,6.08 ; J17.P10 181.57,17.63 ; J17.P10 180.64,18.55 ; J17.P10 179.72,17.63 ; J17.P10 180.64,16.7 ; P1.8 207.14,8.59 ; P1.8 206.2,7.65 ; P1.8 208.08,7.65 ; P1.8 207.14,6.71 ; P1.4 202.06,8.59 ; P1.4 201.12,7.65 ; P1.4 203,7.65 ; P1.4 202.06,6.71 ; 212.22,6.71 P1.12 ; P1.12 212.22,8.59 ; P1.12 213.16,7.65 ; P1.12 211.28,7.65 ; 209.68,6.71 P1.10 ; P1.10 209.68,8.59 ; P1.10 208.74,7.65 ; P1.10 210.62,7.65
  L5 w0.165: 169.7,7.22 J17.P12 ; J17.P12 171.97,7.22 ; J17.P12 170.83,6.08 ; J17.P12 170.83,8.35 ; 165.64,14.33 J17.S1 ; J17.S1 168.51,14.33 ; J17.S1 167.07,12.89 ; J17.S1 167.07,15.76 ; 201.12,7.65 P1.4 ; P1.4 202.06,8.59 ; P1.4 202.06,6.71 ; P1.4 203,7.65 ; J17.P13 179.02,8.35 ; J17.P13 180.16,7.22 ; J17.P13 179.02,6.08 ; J17.P13 177.89,7.22 ; 212.22,6.71 P1.12 ; P1.12 211.28,7.65 ; P1.12 212.22,8.59 ; P1.12 213.16,7.65 ; J17.S2 184.22,14.33 ; J17.S2 181.35,14.33 ; J17.S2 182.78,12.89 ; J17.S2 182.78,15.76 ; 207.14,6.71 P1.8 ; P1.8 208.08,7.65 ; P1.8 206.2,7.65 ; P1.8 207.14,8.59 ; J17.P14 182.71,7.22 ; J17.P14 180.44,7.22 ; J17.P14 181.57,8.35 ; J17.P14 181.57,6.08 ; 199.52,6.71 P1.2 ; P1.2 199.52,8.59 ; P1.2 198.58,7.65 ; P1.2 200.46,7.65 ; 209.68,6.71 P1.10 ; P1.10 209.68,8.59 ; P1.10 210.62,7.65 ; P1.10 208.74,7.65 ; P1.6 204.6,8.59 ; P1.6 205.54,7.65 ; P1.6 203.66,7.65 ; P1.6 204.6,6.71 ; 179.72,17.63 J17.P10 ; J17.P10 180.64,16.7 ; J17.P10 181.57,17.63 ; J17.P10 180.64,18.55 ; J17.P11 168.28,8.35 ; J17.P11 169.42,7.22 ; J17.P11 167.15,7.22 ; J17.P11 168.28,6.08
GND_SIGNAL: length 26.4
  TOP w0.17: v1(197.66,60.83) 198.12,60.37 U17.17 ; v1(204.5,60.68) 204.5,60.11 204.26,59.87 U17.7 ; U17.13 200.94,61.89 200.71,62.13 v1(200.71,62.38) ; v1(201.17,55.02) 201.94,55.79 U17.30 ; J20.14 167.83,67.07 v3(166.97,66.21) ; v1(204.85,61.34) 204.27,61.34 203.64,60.71 U17.8 ; v3(171.25,70.36) 170.23,69.35 J20.17 ; R96.1 v1(209.83,57.56) ; J18.10 204.99,75.22 v1(204.47,74.7) ; U17.11 v1(201.94,61.91) ; J18.9 v1(205.79,74.7) ; v1(205.26,60.76) 204.92,60.42 204.92,60.04 204.26,59.37 U17.6 ; J18.1 v1(212.19,74.88) ; U25.13 169.42,58.28 v1(168.7,59) ; v1(217.67,59.6) 217.18,59.11 U16.9
VCC1V8: length 1.8
  TOP w0.17: R98.1 v1(211.49,54.32)
VCC3V3: length 35.1
  TOP w0.17: U17.12 201.44,61.69 201.43,61.7 201.43,62.13 201.44,62.14 v1(201.44,62.46) 201.44,63.06 200.69,63.82 C122.2 ; R90.1 v1(219.25,62.87) ; v1(205,56.18) 204.32,56.87 U17.1 ; R89.1 v1(211.02,62.87) ; C127.1 202.44,62.64 202.65,62.42 v1(202.78,62.42) 202.59,62.23 202.59,61.83 202.44,61.69 U17.10 ; U17.2 v1(205.1,57.37) ; v1(201.93,54.94) 202.44,55.45 U17.31 ; U17.32 v1(202.94,54.91) ; U17.24 v1(197.64,56.87) ; U17.18 v1(197.64,59.87)
  BOTTOM w0.17: v1(202.94,54.91) 202.94,54.44 202.95,54.43 C130.1 C125.2 201.27,54.28 v1(201.93,54.94) ; v1(205.1,57.37) 205.1,57.38 C121.2 ; C126.1 205.44,55.75 v1(205,56.18) ; v1(204.7,80.69) R92.1 R97.1 R95.1 v1(208.76,80.69) ; C123.2 C128.1 197.62,59.89 v1(197.64,59.87) ; R93.1 v1(210.24,80.69) ; v1(197.64,56.87) 197.64,56.87 C124.2 C129.1
VCCR_SFP INTERFACE_SFP3: length 2.4
  TOP w0.17: v2(168,70.48) 168.63,69.85 J20.15
VCCT_SFP INTERFACE_SFP3: length 2.4
  TOP w0.17: v2(169.9,70.51) 169.43,70.04 169.43,69.54 169.43,69.54 J20.16
CML_SFP_TD_N_SFP INTERFACE_SFP1: length 5
  TOP w0.17: C120.1 215.7,62.87 217.16,61.41 R88.2 217.16,59.99 216.68,59.52 U16.10
CML_SFP_TD_N_SFP INTERFACE_SFP3: length 5.4
  TOP w0.165: R128.2 170.32,42.09 ; R128.2 169.62,42.08 169.46,42.24 169.46,42.5 169.27,42.69 168.67,42.69 168.58,42.6 U24.10 ; R128.2 170.4,41.99 170.99,41.99 171.44,42.44 172.25,42.44 C166.1
CML_SFP_TD_P_SFP INTERFACE_SFP1: length 4.9
  TOP w0.17: C119.1 214.58,62.87 215.56,61.9 R87.2 215.56,59.99 216.18,59.37 U16.11
CML_SFP_TD_P_SFP INTERFACE_SFP3: length 5.5
  TOP w0.165: R127.2 170.32,43.59 ; R127.2 169.62,43.57 169.46,43.41 169.46,43.15 169.32,43.01 168.67,43.01 168.58,43.1 U24.11 ; R127.2 170.33,43.57 170.83,43.08 171.22,43.08 171.55,42.75 172.25,42.75 172.6,43.1 C165.1
FB_3V3_1: length 4.7
  TOP w0.17: C64.2 11.53,65.99 10.9,65.35 10.9,63.93 10.21,63.25 U9.3
FB_3V3_2: length 4.7
  TOP w0.17: C75.2 36.81,67.34 36.17,66.7 36.17,65.28 35.48,64.59 U11.3
FMC.SCL: length 25.9
  TOP w0.17: v1(197.51,58.88) 198.74,58.88 U17.20 ; J18.5 v1(208.99,74.8)
  L4 w0.17: v1(197.51,58.88) 200.85,58.88 205.46,63.49 205.46,67.36 208.99,70.89 v1(208.99,74.8)
FMC.SDA: length 28.2
  TOP w0.17: J18.4 v1(209.79,74.79) ; U17.21 198.13,58.37 197.98,58.23 v1(196.8,58.23)
  L4 w0.17: v1(196.8,58.23) 200.67,58.23 205.82,63.38 205.82,67.13 209.79,71.1 v1(209.79,74.79)
MOD_ABS_SFP INTERFACE_SFP1: length 3.2
  TOP w0.17: J18.6 208.19,78.07 v1(207.65,78.61)
  BOTTOM w0.17: v1(207.65,78.61) R95.2
N01450_SFP INTERFACE_SFP1: length 3
  TOP w0.17: v1(199.9,62.43) 200.44,61.89 U17.14
  BOTTOM w0.17: C131.1 200.45,62.98 v1(199.9,62.43)
N01454_SFP INTERFACE_SFP1: length 3.1
  TOP w0.17: U17.15 199.94,61.6 v1(199.09,62.46)
  BOTTOM w0.17: v1(199.09,62.46) 199.45,62.82 C131.2
N04910_SFP INTERFACE_SFP1: length 5.4
  TOP w0.17: v1(217.79,54.85) 217.18,55.46 U16.4 ; U16.1 215.68,55.46 v1(215.07,54.85)
  BOTTOM w0.17: v1(215.07,54.85) v1(217.79,54.85)
N04977_SFP INTERFACE_SFP1: length 5.4
  TOP w0.17: U16.5 218.28,56.55 v1(218.9,55.93) ; U16.8 218.33,58.05 v1(218.9,58.62)
  BOTTOM w0.17: v1(218.9,55.93) v1(218.9,58.62)
R_N_SFP INTERFACE_SFP1: length 2.5
  TOP w0.17: U16.15 213.96,57.05 R98.2
R_P_SFP INTERFACE_SFP1: length 2.1
  TOP w0.17: R96.2 213.7,57.56 213.71,57.55 U16.14
RS_SFP INTERFACE_SFP1: length 3.3
  TOP w0.17: J18.7 207.39,78.06 v1(206.68,78.77)
  BOTTOM w0.17: v1(206.68,78.77) R97.2
SFP_RD_N_SFP INTERFACE_SFP1: length 16.9
  TOP w0.17: J18.12 206.19,69.81 205.81,70.18 205.26,70.18 204.52,69.44 204.52,67.85 205.16,67.21 205.91,67.21 206.17,66.94 206.17,60.29 204.26,58.37 U17.4
SFP_RD_P_SFP INTERFACE_SFP1: length 18.1
  TOP w0.17: U17.5 204.26,58.87 205.82,60.44 205.82,66.83 205.77,66.88 204.98,66.88 204.14,67.72 204.14,69.67 204.98,70.51 206.58,70.51 206.99,70.1 J18.13
SFP_TD_N_SFP INTERFACE_SFP1: length 10
  TOP w0.17: R90.2 R91.1 216.69,63.88 216.68,63.87 C120.2 215.65,63.87 214.24,65.28 212.32,65.28 211.79,65.81 211.79,67.38 211.79,67.38 J18.19
SFP_TD_N_SFP INTERFACE_SFP3: length 31.1
  TOP w0.165: J20.19 171.83,66.79 172.19,66.44 172.19,64.86 v1(172.5,64.54) ; C166.2 173.63,42.09 173.97,42.44 175.46,42.44 176.81,43.79 v1(176.81,44.07)
  L4 w0.165: v1(172.5,64.54) 172.19,64.22 172.19,64.06 172.94,63.31 173.47,63.31 176.5,60.27 176.5,44.37 v1(176.81,44.07)
SFP_TD_P_SFP INTERFACE_SFP1: length 9.7
  TOP w0.17: J18.18 210.99,66.13 212.17,64.95 214.01,64.95 214.55,64.4 C119.2 214,63.87 213.99,63.88 R94.1 R89.2
SFP_TD_P_SFP INTERFACE_SFP3: length 30.6
  TOP w0.165: v1(171.55,64.54) 171.87,64.86 171.87,66.31 171.03,67.14 J20.18 ; v1(175.86,44.07) 175.86,43.7 175.99,43.56 175.99,43.42 175.33,42.75 173.97,42.75 C165.2
  L4 w0.165: v1(171.55,64.54) 171.87,64.22 171.87,63.93 172.81,62.99 173.34,62.99 176.19,60.14 176.19,44.4 v1(175.86,44.07)
SS_3V3_1: length 3.4
  TOP w0.17: C65.1 5.64,63.24 5.64,63.25 U9.13
SS_3V3_2: length 3.4
  TOP w0.17: C76.1 30.91,64.59 30.91,64.59 U11.13
THRADJ_SFP INTERFACE_SFP1: length 4.3
  TOP w0.17: v1(203.78,62.53) 202.94,61.69 U17.9
  BOTTOM w0.17: v1(203.78,62.53) 204.22,62.97 C132.2 203.46,63.53 203.46,63.53 R102.2
VP3V5: length 35.6
  TOP w0.17: 32.2,61.56 30.08,61.56 29.91,61.73 29.91,63.73 ; 32.2,61.56 32.2,61.55 32.49,61.26 33.74,61.26 ; 32.2,61.56 U11.16 ; 29.91,63.73 30.05,63.59 U11.15 ; 29.91,63.73 29.91,63.97 30.03,64.09 U11.14 ; C71.1 36.93,62.67 36.92,62.66 C70.1 33.74,61.26 ; U9.15 4.78,62.25 4.64,62.39 ; 4.64,62.39 4.64,62.63 4.76,62.75 U9.14 ; 4.64,62.39 4.64,60.38 4.81,60.21 6.92,60.21 ; U11.17 32.7,62.31 33.74,61.26 ; C60.1 11.66,61.33 11.65,61.32 C61.1 8.47,59.92 ; 8.47,59.92 7.42,60.96 U9.17 ; 8.47,59.92 7.21,59.92 6.92,60.21 6.92,60.21 ; 6.92,60.21 U9.16
VREF_SFP INTERFACE_SFP1: length 2.9
  TOP w0.17: U17.3 204.56,57.87 v1(205,58.32)
  BOTTOM w0.17: C133.1 205.38,58.7 v1(205,58.32)
N146225: length 3.5
  TOP w0.17: U9.2 10.37,62.75 11.28,63.65 11.28,63.93 11.61,64.26 12.47,64.26 C64.1
N185241: length 3.5
  TOP w0.17: U11.2 35.64,64.09 36.55,65 36.55,65.28 36.88,65.61 37.74,65.61 C75.1
N224336: length 3
  TOP w0.17: J18.2 v1(211.39,78.73)
  BOTTOM w0.17: R93.2 211.39,79.78 v1(211.39,78.73)
N224340: length 3.4
  TOP w0.17: v1(205.73,78.87) 206.59,78.01 J18.8
  BOTTOM w0.17: R92.2 205.73,79.78 v1(205.73,78.87)

## Copper pours and planes (outline as drawn; the poured copper is in the pictures)
12V_CONN on L3: 3,24.49 34.99,24.49 35.99,23.49 35.99,2.5 34.49,1 9,1 8,2 8,6.5 7,7.5 3,7.5 2,8.5 2,23.49
12V_FUSE on TOP: 30.73,27.18 61.01,27.18 61.47,26.72 61.47,14.15 61.01,13.69 31.39,13.69 30.73,14.35
12V_SW on TOP: 36.99,13.5 60.98,13.5 61.48,13 61.48,2 60.48,1 37.99,1 36.49,2.5 36.49,13
GND_IN on TOP: 2.49,27.18 30.48,27.18 30.48,1.99 29.49,1 9,1 8,2 8,6.5 7,7.5 3,7.5 2,8.5 2,26.69
GND_POWER on TOP: 30.48,27.41 2.46,27.41 2.03,27.84 2.03,37.95 2.84,38.76 29.57,38.76 30.48,37.85
GND_POWER on L2, L5: 2,2 228,2 228,113 2,113 ; 1 cut-out
VCC3V3 on L3: 91.98,107.47 226.44,107.47 227.94,105.97 227.94,47.49 220.94,40.49 220.94,16.5 101.97,16.5 99.97,18.5 99.97,55.99 24.49,55.99 22.99,57.49 22.99,66.98 24.49,68.48 87.98,68.48 90.98,71.48 90.98,106.47
VCCR_SFP INTERFACE_SFP3 on L3: 166.45,72.09 168.78,72.09 168.96,71.91 168.96,61.01 168.94,60.99 168.94,59.16 168.73,58.95 162.59,58.95 162.31,59.23 162.31,64.34 162.92,64.95 165.91,64.95 166.22,65.25 166.22,71.86
